# Altium PCB PCB.PcbDoc (part 1 of 3)
Units mm, origin at the board's own origin, x right, y up, seen from the top; angles counter-clockwise.
Board outline 58.5 x 91.95 mm, 2 copper layers (Top Layer, Bottom Layer), stack 1.571 mm thick; 57 components, 46 nets, 183 pads, 18 vias.
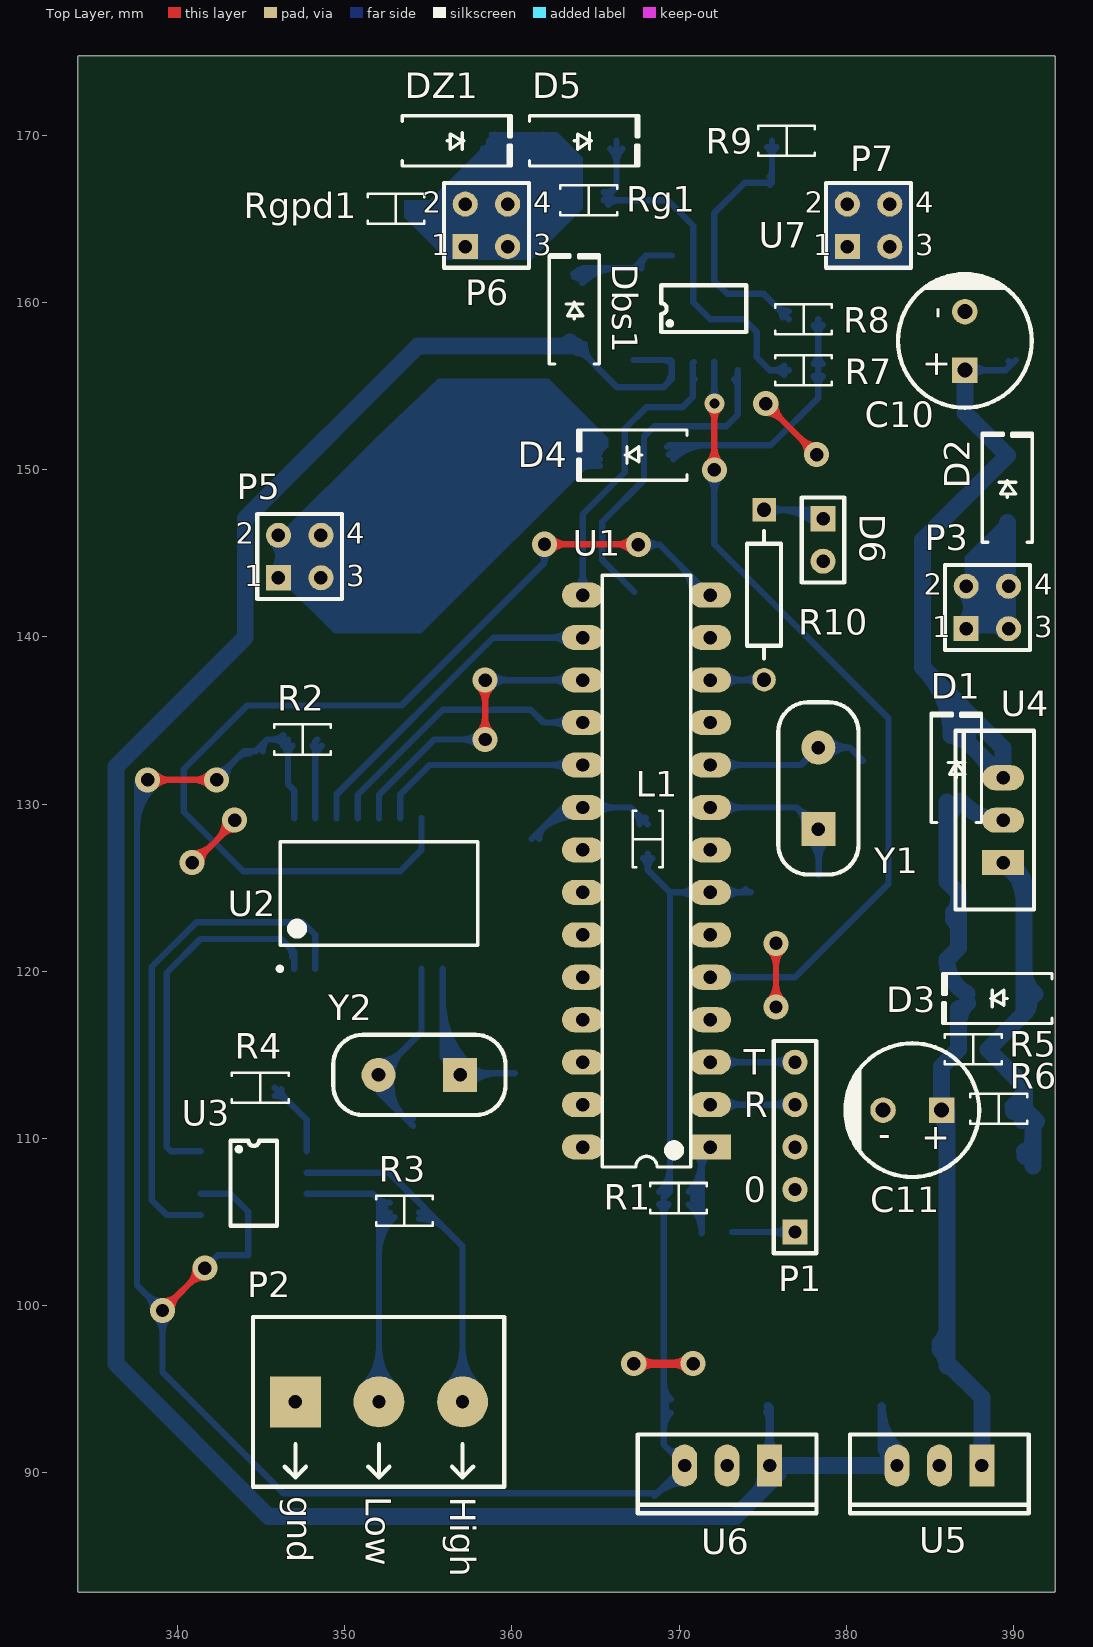
[diagram p0: Top Layer view]
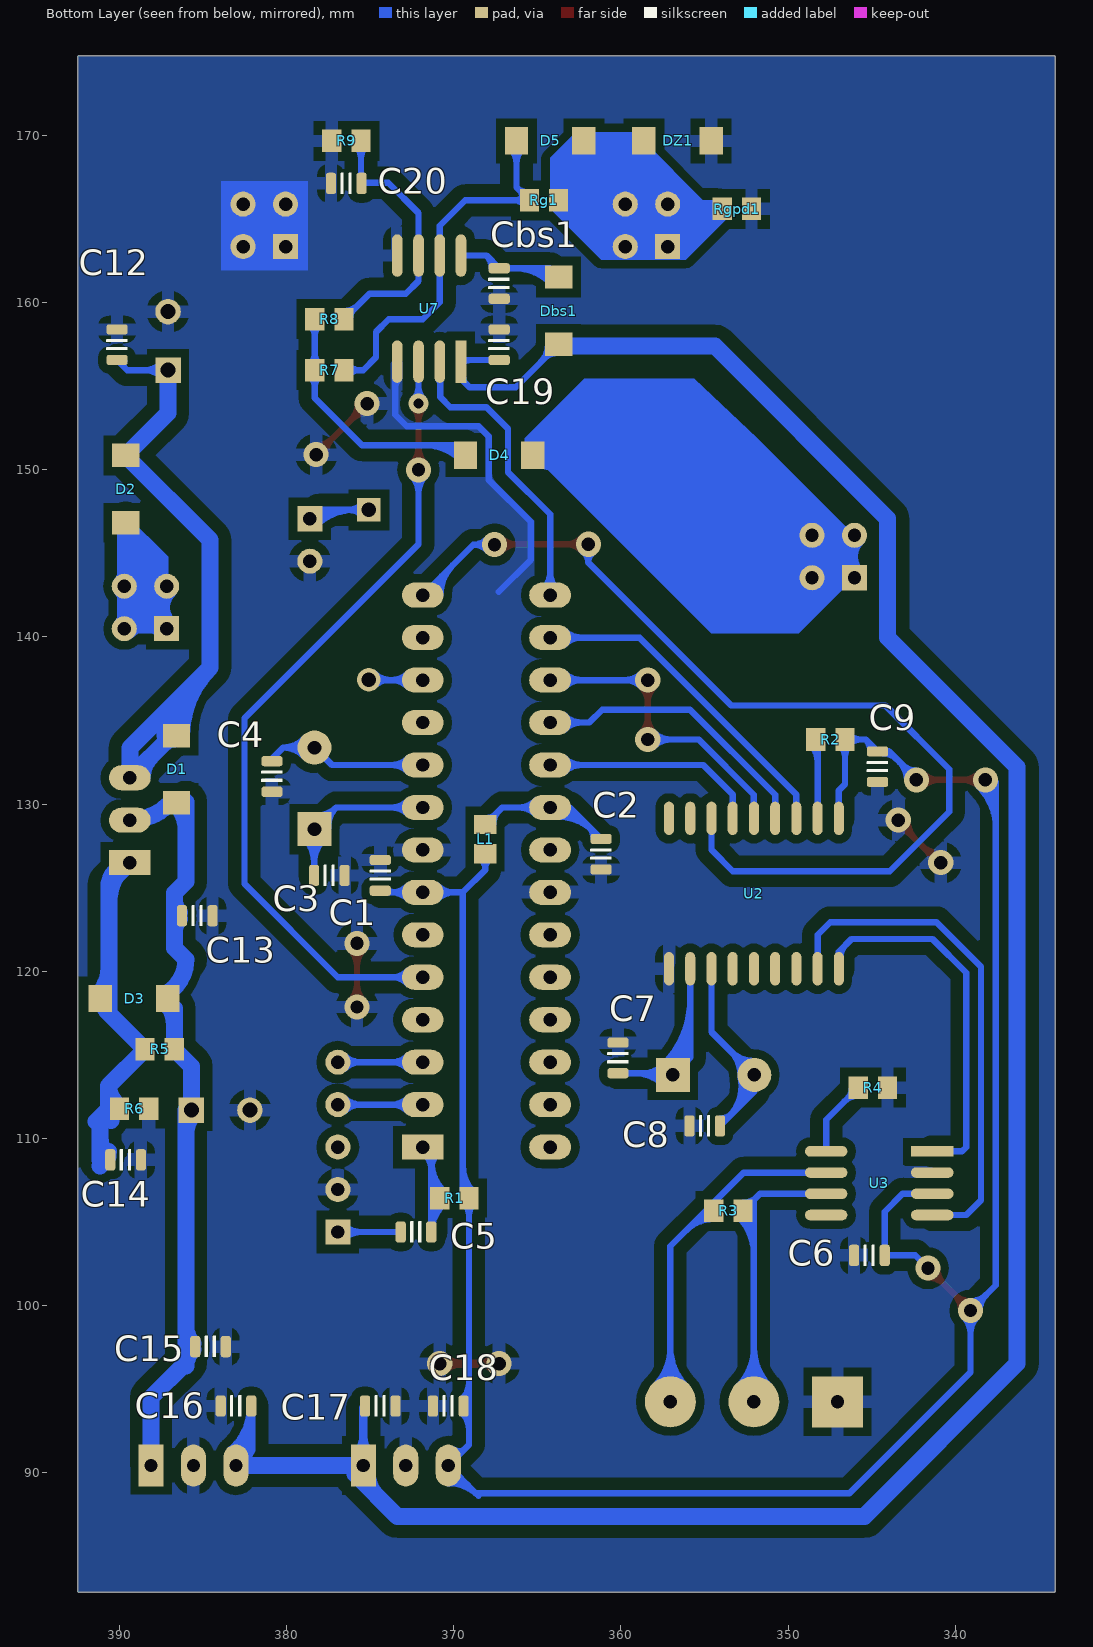
[diagram p1: Bottom Layer view, seen from below]
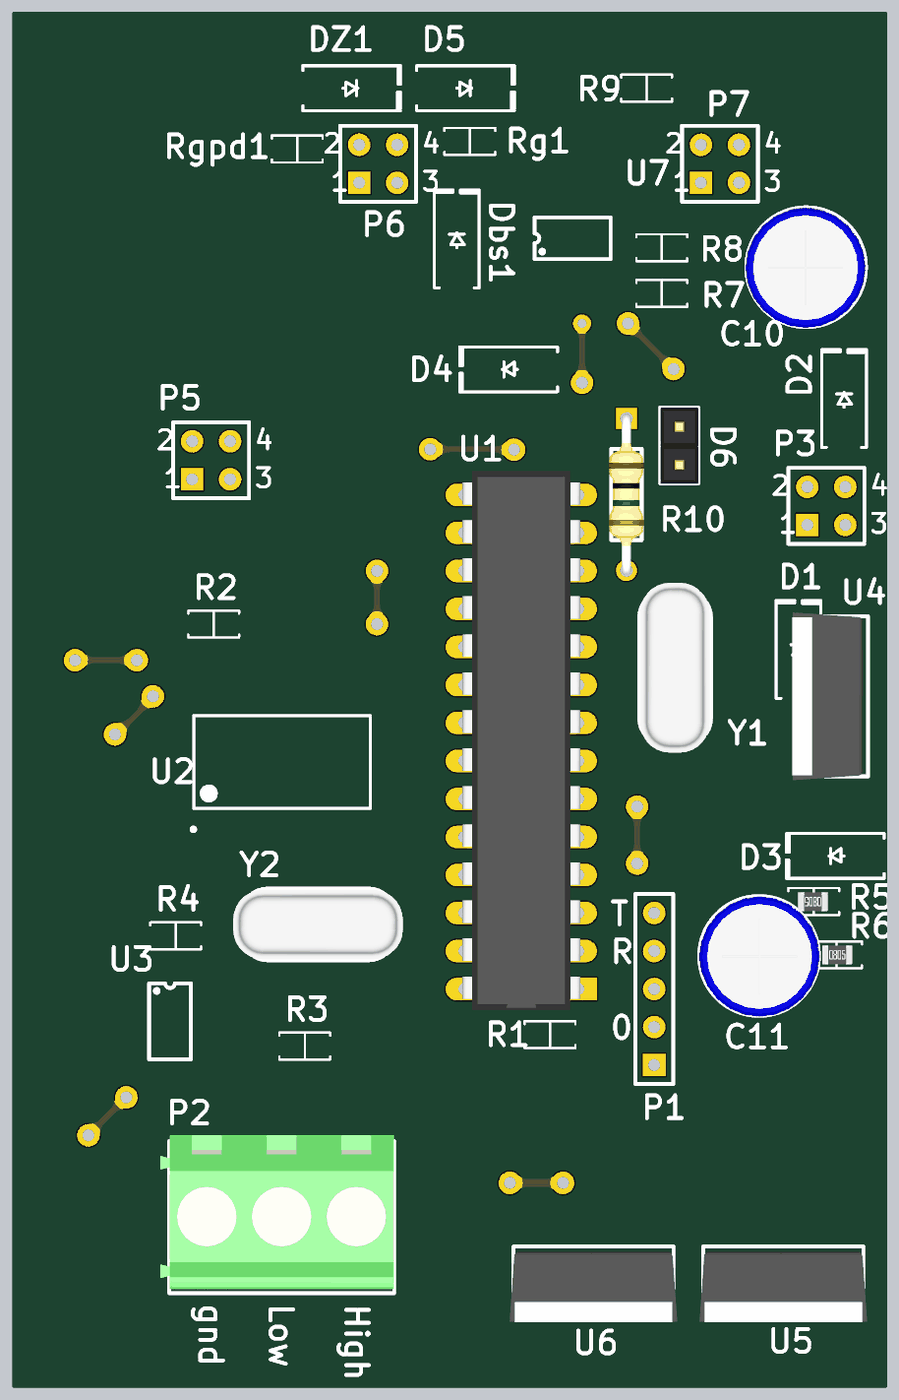
[diagram p4: 3D render of the assembled board from above, using the file's embedded part models]
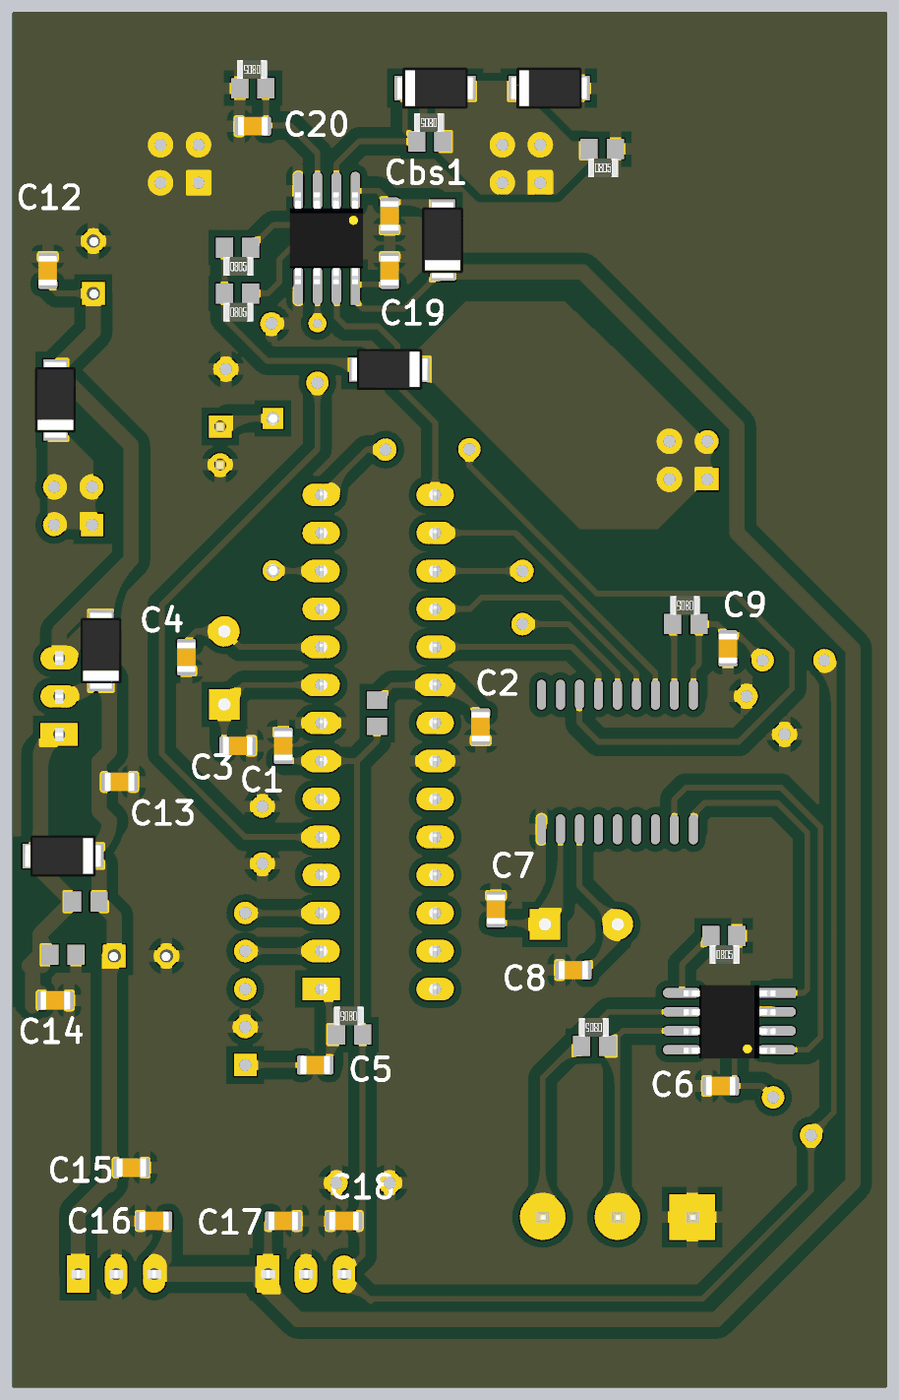
[diagram p5: 3D render of the assembled board from below, using the file's embedded part models]

## Layer stack, top to bottom
Top Layer: signal copper 0.0356
Dielectric: core 1.5, FR-4, Dk 4.8
Bottom Layer: signal copper 0.0356

## Board outline
334.01,82.957 ccw(c334.137,82.957) 334.137,82.83 392.382,82.83 ccw(c392.382,82.957) 392.51,82.957 ccw(c392.382,82.957) 392.499,83.007 ccw(c392.382,83.058) 392.51,83.058 392.51,174.651 ccw(c392.382,174.651) 392.382,174.778 334.137,174.778 ccw(c334.137,174.651) 334.01,174.651

## Design rules (kind name [scope] priority, off if disabled: settings)
Clearance Clearance_plane [(OnLayer('Bottom Layer') AND IsTrack) vs InNet('SOURCE')] p1: gap=0.762
Clearance [All] p2: gap=0.508
ComponentClearance [All] p1 off: gap=0.254 collisioncheckmode=3 verticalgap=0.254 showdistances=FALSE
HoleSize [All] p1: absolutevalues=TRUE maxlimit=4 minlimit=0.8 maxpercent=80.000 minpercent=20.000
PolygonConnect [All] p1: connectstyle=Relief reliefconductorwidth=0.762 reliefentries=4 polygonreliefangle="90 Angle"
RoutingVias [All] p1: holewidth=0.8 width=1.5 viastyle="Through Hole" minholewidth=0.8 minwidth=1.5 maxholewidth=1 maxwidth=2
SilkToSilkClearance [All] p1: silktosilkclearance=0.508
SilkscreenOverComponentPads [All] p1: minsilkscreentomaskgap=0.508
SolderMaskExpansion [All] p1: expansion=0.102
Width [All] p1: maxlimit=1.016 minlimit=0.381 preferedwidth=0.508
24 further rules are at their usual default settings.

## Classes and differential pairs
component class atmega: C1 C2 C3 C4 C5 C6 C7 C8 C9 D6 D? L1 P1 P2 R1 R2 R3 R4 R10 U1 U2 U3 Y1 Y2
component class driver: C19 C20 Cbs1 D4 D5 Dbs1 DZ1 P5 P6 P7 R7 R8 R9 Rg1 Rgpd1 U7
component class supplies: C10 C11 C12 C13 C14 C15 C16 C17 C18 D1 D2 D3 P3 R5 R6 U4 U5 U6

## Components (designator, comment, footprint, x,y, rotation, side; value= is the part's Value field where it differs from the comment)
C1 "100nF" CAP_0805 374.396,125.73 r90 bottom
C2 "100nF" CAP_0805 361.188,127 r90 bottom
C3 "22pF" CAP_0805 377.444,125.73 r0 bottom
C4 "22pF" CAP_0805 380.873,131.648 r90 bottom
C5 "100nF" CAP_0805 372.262,104.394 r0 bottom
C6 "100nF" CAP_0805 345.135,102.997 r0 bottom
C7 "22pF" CAP_0805 360.172,114.808 r270 bottom
C8 "22pF" CAP_0805 354.99,110.744 r180 bottom
C9 "100nF" CAP_0805 344.653,132.232 r270 bottom
C10 "CapacitorPol" CP3.5mm-8.0mm 387.096,155.956 r270 top
C11 "CapacitorPol" CP3.5mm-8.0mm 385.699,111.684 r0 top
C12 "100nF" CAP_0805 390.144,157.48 r270 bottom
C13 "100nF" CAP_0805 385.343,123.317 r0 bottom
C14 "100nF" CAP_0805 389.636,108.712 r0 bottom
C15 "100nF" CAP_0805 384.556,97.536 r0 bottom
C16 "100nF" CAP_0805 383.032,93.98 r180 bottom
C17 "100nF" CAP_0805 374.396,93.98 r0 bottom
C18 "100nF" CAP_0805 370.332,93.98 r180 bottom
C19 "100nF" CAP_0805 367.284,157.48 r90 bottom
C20 "100nF" CAP_0805 376.428,167.132 r0 bottom
Cbs1 "100nF" CAP_0805 367.284,161.138 r270 bottom
D1 "BYD77" "ST DO214AC SMA" 386.588,132.08 r90 top
D2 "BYD77" "ST DO214AC SMA" 389.636,148.844 r90 top
D3 "BYD77" "ST DO214AC SMA" 389.128,118.364 r180 top
D4 "BYD77" "ST DO214AC SMA" 367.284,150.876 r180 top
D5 "BYD77" "ST DO214AC SMA" 364.236,169.672 r0 top
D6 "color?" HDR1X2 378.612,147.066 r270 top
Dbs1 "BYD77" "ST DO214AC SMA" 363.728,159.512 r90 top
DZ1 "Z15V" "ST DO214AC SMA" 356.616,169.672 r0 top
L1 "?H" "RES 0805/2012" 368.122,127.903 r270 top
P1 "USART" HDR1X5 376.936,104.394 r90 top
P2 "CAN" KRE_3 347.044,94.234 r0 top
P3 "Header 2X2" HDR2X2 387.175,140.488 r0 top locked
P5 "Header 2X2" HDR2X2 346.027,143.536 r0 top locked
P6 "Header 2X2" HDR2X2 357.203,163.348 r0 top locked
P7 "Header 2X2" HDR2X2 380.063,163.348 r0 top locked
R1 "10k" "RES 0805/2012" 369.965,106.426 r0 top
R2 "10k" "RES 0805/2012" 347.472,133.858 r0 top
R3 "120" "RES 0805/2012" 353.568,105.664 r0 top
R4 "10k" "RES 0805/2012" 344.932,113.03 r180 top
R5 "?K" "RES 0805/2012" 387.604,115.316 r180 top
R6 "?K" "RES 0805/2012" 389.128,111.76 r0 top
R7 "?K" "RES 0805/2012" 377.444,155.956 r180 top
R8 "?K" "RES 0805/2012" 377.444,159.004 r180 top
R9 "?K" "RES 0805/2012" 376.428,169.672 r0 top
R10 "470" R400-2.0mm 375.082,147.599 r270 top
Rg1 "1R" "RES 0805/2012" 364.603,166.116 r0 top
Rgpd1 "10k" "RES 0805/2012" 353.06,165.608 r180 top
U1 "ATmega328P" DIP28-300(100) 371.856,109.474 r90 top
U2 "MCP2515-E/SO" WSO18_L 352.044,124.642 r90 top
U3 "MCP2551-I/SN" SOIC08-150(50) 341.376,109.22 r270 top
U4 "LM317" TO-220/123 389.382,126.492 r90 top
U5 "LM7815" TO-220/123 388.112,90.424 r180 top
U6 "LM7805" TO-220/123 375.412,90.424 r180 top
U7 "IR2127S" SOIC08-150(50) 369.57,156.464 r0 top
Y1 "16MHz" HC49-US-THT 378.333,130.937 r90 top
Y2 "16MHz" HC49-US-THT 354.457,113.792 r180 top

## Footprints (in the part's own frame and the unit in brackets; to place one, negate y for a bottom-side part, rotate by r counter-clockwise, add the part's x,y. Pads: shape width x height; smd on the part's side, far side on the other; paste and mask are expansions set on the pad)
CAP_0805 [mil]
  rrect50% 24x50 smd: 1(-36,0) 2(36,0)
  silkscreen extent -12,-24 12,24, body extent -39,-25 39,25, height 39
CP3.5mm-8.0mm [mil] "Capacitor, Electrolytic, Radial; Body 8 x 10.5 mm (Dia.xH typ); Pin Spacing 3.5 mm (typ)"
  rect 60x60 hole 35: 1(0,0)
  round 60 hole 35: 2(-137.8,0)
  silkscreen extent -226,-157 89,157, body extent -226,-160 91,157, height 468
DIP28-300(100) [mm] "DIP, 28-Leads, Row Spacing 7.62mm, Pitch 2.54mm, Body 34.67x7.3mm"
  rect 1.5x2.5 hole 0.8: 1(0,0)
  oval 1.5x2.5 hole 0.8: 2(2.54,0) 3(5.08,0) 4(7.62,0) 5(10.16,0) 6(12.7,0) 7(15.24,0) 8(17.78,0) 9(20.32,0) 10(22.86,0) 11(25.4,0) 12(27.94,0) 13(30.48,0) 14(33.02,0) 15(33.02,7.62) 16(30.48,7.62) 17(27.94,7.62) 18(25.4,7.62) 19(22.86,7.62) 20(20.32,7.62) 21(17.78,7.62) 22(15.24,7.62) 23(12.7,7.62) 24(10.16,7.62) 25(7.62,7.62) 26(5.08,7.62) 27(2.54,7.62) 28(0,7.62)
  silkscreen extent -1.19,1.16 34.21,6.46, body extent -1.4,-0.13 34.6,7.74, height 5.08
HC49-US-THT [mil] "THT Quartz Crystal"
  rect 80x80 hole 32: 1(-96.06,0)
  round 80 hole 32: 2(96.06,0)
  silkscreen extent -203,-94 203,94, body extent -223,-91 224,92, height 138
HDR1X2 [mm] "Connector; Header; 2 Position"
  rect 1.5x1.5 hole 0.8: 1(0,0)
  round 1.5 hole 0.8: 2(2.54,0)
  silkscreen extent -1.27,-1.27 3.81,1.27, body extent -1.24,-1.27 3.84,1.27, height 8.68
HDR1X5 [mm] "Connector; Header; 5 Position"
  rect 1.5x1.5 hole 0.8: 1(0,0)
  round 1.5 hole 0.8: 2(2.54,0) 3(5.08,0) 4(7.62,0) 5(10.16,0)
  silkscreen extent -1.27,-1.27 11.43,1.27
HDR2X2 [mm] "Connector; Header; 2x2 Position"
  rect 1.5x1.5 hole 0.8: 1(0,0)
  round 1.5 hole 0.8: 2(0,2.54) 3(2.54,0) 4(2.54,2.54)
  silkscreen extent -1.27,-1.27 3.81,3.81
KRE_3 [mil] "Terminal Block 3 pins"
  rect 120x120 hole 31.5: 1(0,0)
  round 120 hole 31.5: 2(196.85,0) 3(393.7,0)
  silkscreen extent -100,-200 492,200, body extent -123,-190 491,216, height 559
R400-2.0mm [mm] "Axial Device, Thru-Hole; 2 Leads; 0.4 in Pin Spacing"
  rect 1.4x1.4 hole 0.85: 1(0,0)
  round 1.4 hole 0.85: 2(10.16,0)
  silkscreen extent 1.27,-1.02 8.89,1.02, body extent -0.3,-1.17 10.46,1.14, height 2.93
"RES 0805/2012" [mm] "Chip Resistor, 2-Leads, Body 2.00x1.25mm, IPC Medium Density"
  rect 1.15x1.35 smd far side: 1(-0.875,0) 2(0.875,0)
  silkscreen extent -1.7,-0.9 1.7,0.9, body extent -0.95,-0.62 1.05,0.63, height 0.6
SOIC08-150(50) [mm] "SOIC; 8 Leads; Row Spacing 3.81 mm; Pitch 1.27 mm; 3D Antonio Fagaldo"
  rect 0.635x2.54 smd far side: 1(0,0)
  oval 0.635x2.54 smd far side: 2(1.27,0) 3(2.54,0) 4(3.81,0) 5(3.81,6.35) 6(2.54,6.35) 7(1.27,6.35) 8(0,6.35)
  silkscreen extent -0.64,1.78 4.44,4.57, body extent -0.51,0.11 4.38,6.24, height 1.76
"ST DO214AC SMA" [mm] "Molded Diode, 2-Leads, Body 4.30x2.60mm, IPC Medium Density"
  rect 1.4x1.64 smd far side: 1(-2.015,0) 2(2.015,0)
  silkscreen extent -3.18,-1.5 3.35,1.5, body extent -2.6,-1.37 2.6,1.37, height 2.4
TO-220/123 [mm] "TO, Thru-Hole, Vertical, Heatsink Mounted; 3 In-Line Leads; Pitch 2.54 mm"
  rect 1.5x2.5 hole 0.8: 1(0,0)
  oval 1.5x2.5 hole 0.8: 2(2.54,0) 3(5.08,0)
  silkscreen extent -2.81,-1.85 7.89,2.85, body extent -3.07,-1.49 8.15,3.2, height 19.68
WSO18_L [mm] "18-Pin Small Outline Integrated Circuit 1.27 mm Pitch, IPC High Density"
  oval 2x0.6 smd far side: 1(-4.5,5.08) 2(-4.5,3.81) 3(-4.5,2.54) 4(-4.5,1.27) 5(-4.5,0) 6(-4.5,-1.27) 7(-4.5,-2.54) 8(-4.5,-3.81) 9(-4.5,-5.08) 10(4.5,-5.08) 11(4.5,-3.81) 12(4.5,-2.54) 13(4.5,-1.27) 14(4.5,0) 15(4.5,1.27) 16(4.5,2.54) 17(4.5,3.81) 18(4.5,5.08)
  silkscreen extent -4.62,-5.9 3.1,6.05, body extent -3.8,-5.95 3.8,5.95, height 2.65

## Part data
C1 C2 C3 C4 C5 C6 C7 C8 C9 C12 C13 C14 C15 C16 C17 C18 C19 C20 Cbs1: library part Cap_0805, "Capacitor"
C10 C11: "Solid Aluminum Capacitor with Organic Semiconductor Electrolyte: 100uF, 10V, Bulk Pack"
D1 D2 D3 D4 D5 Dbs1 DZ1: library part Diode_SMA, "Diode"
D6: library part LED_0805, "LED"
L1: library part Ind_0805, "Inductor"
P1: library part "Header 5", "Header, 5-Pin"
P2: library part KRE_3, "Terminal Block 1x3"
P3 P5 P6 P7: "Header, 2-Pin, Dual row"
R1 R2 R3 R4 R5 R6 R7 R8 R9 R10 Rg1 Rgpd1: library part Res_0805, "Resistor"
U1: "8-bit AVR Microcontroller, 32KB Flash, 1KB EEPROM, 2KB SRAM, 28-pin PDIP, Industrial Grade (-40°C to 85°C)"
U2: library part CMP-0186-00035-2, "Stand-Alone CAN Controller With SPI Interface, 18-Pin SOIC, Extended Temperature"
U3: library part CMP-1721-00003-1, "High-Speed CAN Transceiver, / 1 Mb/s, 4.5 to 5.5 V, 8-Pin SOIC (SN), Industrial Temperature, RoHS, Tube"
U4: library part L7805ACV, "Precision 1A Regulator"
U5 U6: library part µA7805CKC, "Positive-Voltage Regulator"
U7: "Current Sensing Single Channel Driver"
Y1 Y2: library part Crystal, "Crystal"

## Via types
v1: diameter 1.5, hole 0.8, Top Layer to Bottom Layer, 17 vias
v2: diameter 1.2, hole 0.6, Top Layer to Bottom Layer, 1 vias

## Nets (pads, with @x,y where several pads share a name; then routed paths per layer and width w, separated by ;. In a path a pad name is that pad's centre, name@x,y a point inside that pad or via, vN(x,y) a via of type N, cw(c..) or ccw(c..) an arc to the next point about the centre after c; other vN are vias at no path point)
+5V: C1.1 C6.1 C9.1 C18.2 L1.2 R1.1 R2.1 U1.7 U2.18 U3.3 U6.3 | length 312
  Top Layer w0.381: v1(338.201,131.445) v1(342.328,131.445) ; v1(339.09,99.695) v1(341.63,102.235) ; v1@338.597,131.049 cw(c339.552,130.094) 339.552,131.445 ; v1@338.597,131.049 cw(c339.552,130.094) 339.552,131.445 ; v1@338.597,131.049 cw(c339.552,130.094) 339.552,131.445 ; v1@338.597,131.049 cw(c339.552,130.094) 339.552,131.445 ; v1@338.597,131.841 ccw(c339.552,132.796) 339.552,131.445 ; v1@338.597,131.841 ccw(c339.552,132.796) 339.552,131.445 ; v1@338.597,131.841 ccw(c339.552,132.796) 339.552,131.445 ; v1@338.597,131.841 ccw(c339.552,132.796) 339.552,131.445 ; v1@339.09,100.254 ccw(c339.09,101.605) 340.045,100.65 ; v1@339.09,100.254 ccw(c339.09,101.605) 340.045,100.65 ; v1@339.09,100.254 ccw(c339.09,101.605) 340.045,100.65 ; v1@339.09,100.254 ccw(c339.09,101.605) 340.045,100.65 ; v1@339.649,99.695 cw(c341,99.695) 340.045,100.65 ; v1@339.649,99.695 cw(c341,99.695) 340.045,100.65 ; v1@339.649,99.695 cw(c341,99.695) 340.045,100.65 ; v1@339.649,99.695 cw(c341,99.695) 340.045,100.65 ; 340.675,101.28 cw(c341.63,100.325) v1@341.63,101.676 ; 340.675,101.28 ccw(c339.72,102.235) v1@341.071,102.235 ; 340.675,101.28 cw(c341.63,100.325) v1@341.63,101.676 ; 340.675,101.28 ccw(c339.72,102.235) v1@341.071,102.235 ; 340.675,101.28 cw(c341.63,100.325) v1@341.63,101.676 ; 340.675,101.28 ccw(c339.72,102.235) v1@341.071,102.235 ; 340.675,101.28 cw(c341.63,100.325) v1@341.63,101.676 ; 340.675,101.28 ccw(c339.72,102.235) v1@341.071,102.235 ; 340.978,131.445 cw(c340.978,130.094) v1@341.933,131.049 ; 340.978,131.445 ccw(c340.978,132.796) v1@341.933,131.841 ; 340.978,131.445 cw(c340.978,130.094) v1@341.933,131.049 ; 340.978,131.445 ccw(c340.978,132.796) v1@341.933,131.841 ; 340.978,131.445 cw(c340.978,130.094) v1@341.933,131.049 ; 340.978,131.445 ccw(c340.978,132.796) v1@341.933,131.841 ; 340.978,131.445 cw(c340.978,130.094) v1@341.933,131.049 ; 340.978,131.445 ccw(c340.978,132.796) v1@341.933,131.841
  Bottom Layer w0.381: v1@337.82,131.572 337.566,131.318 337.566,101.219 v1(339.09,99.695) 339.09,96.012 346.329,88.773 368.681,88.773 U6.3@370.332,90.424 369.09,91.666 R1.1@369.09,106.426 369.457,106.793 369.457,124.714 ; U3.3@341.376,106.68 343.154,106.68 344.221,105.613 C6.1@344.221,102.997 342.392,102.997 v1(341.63,102.235) ; v1@342.297,131.477 343.967,133.147 C9.1@344.653,133.147 345.364,133.858 ; U2.18@346.964,129.142 346.964,130.81 346.597,131.177 R2.1@346.597,133.858 345.364,133.858 ; L1.2@368.122,127.028 368.122,126.049 369.457,124.714 ; C1.1@374.294,124.714 U1.7@371.856,124.714 369.457,124.714 ; 337.566,128.561 cw(c341.085,128.561) v1@338.597,131.049 ; 337.566,128.561 cw(c341.085,128.561) v1@338.597,131.049 ; 337.566,128.561 cw(c341.085,128.561) v1@338.597,131.049 ; 337.566,128.561 cw(c341.085,128.561) v1@338.597,131.049 ; 337.566,129.481 cw(c340.165,129.481) v1@338.327,131.319 ; 337.566,129.481 cw(c340.165,129.481) v1@338.327,131.319 ; 337.566,129.481 cw(c340.165,129.481) v1@338.327,131.319 ; 337.566,129.481 cw(c340.165,129.481) v1@338.327,131.319 ; 337.566,130.401 cw(c339.245,130.401) v1@338.058,131.588 ; 337.566,130.401 cw(c339.245,130.401) v1@338.058,131.588 ; 337.566,130.401 cw(c339.245,130.401) v1@338.058,131.588 ; 337.566,130.401 cw(c339.245,130.401) v1@338.058,131.588 ; 338.135,100.65 cw(c337.18,99.695) v1@338.531,99.695 ; 338.135,100.65 ccw(c339.09,101.605) v1@339.09,100.254 ; 338.135,100.65 cw(c337.18,99.695) v1@338.531,99.695 ; 338.135,100.65 ccw(c339.09,101.605) v1@339.09,100.254 ; 338.135,100.65 cw(c337.18,99.695) v1@338.531,99.695 ; 338.135,100.65 ccw(c339.09,101.605) v1@339.09,100.254 ; 338.135,100.65 cw(c337.18,99.695) v1@338.531,99.695 ; 338.135,100.65 ccw(c339.09,101.605) v1@339.09,100.254 ; v1@338.694,99.299 cw(c337.739,98.344) 339.09,98.344 ; v1@338.694,99.299 cw(c337.739,98.344) 339.09,98.344 ; v1@338.694,99.299 cw(c337.739,98.344) 339.09,98.344 ; v1@338.694,99.299 cw(c337.739,98.344) 339.09,98.344 ; 339.09,98.344 cw(c340.441,98.344) v1@339.486,99.299 ; 339.09,98.344 cw(c340.441,98.344) v1@339.486,99.299 ; 339.09,98.344 cw(c340.441,98.344) v1@339.486,99.299 ; 339.09,98.344 cw(c340.441,98.344) v1@339.486,99.299 ; v1@342.328,132.004 ccw(c342.328,133.202) 343.175,132.355 ; v1@342.328,132.004 ccw(c342.328,133.202) 343.175,132.355 ; v1@342.328,132.004 ccw(c342.328,133.202) 343.175,132.355 ; v1@342.328,132.004 ccw(c342.328,133.202) 343.175,132.355 ; v1@342.888,131.445 cw(c344.392,131.445) 343.329,132.509 ; v1@342.888,131.445 cw(c344.392,131.445) 343.329,132.509 ; v1@342.888,131.445 cw(c344.392,131.445) 343.329,132.509 ; v1@342.888,131.445 cw(c344.392,131.445) 343.329,132.509 ; 343.52,132.7 cw(c344.322,131.898) C9.1@344.322,133.032 ; 343.52,132.7 cw(c344.322,131.898) C9.1@344.322,133.032 ; 343.52,132.7 cw(c344.322,131.898) C9.1@344.322,133.032 ; 343.52,132.7 cw(c344.322,131.898) C9.1@344.322,133.032 ; C9.1@345.097,133.154 cw(c346.012,133.21) 345.364,133.858 ; C9.1@345.097,133.154 cw(c346.012,133.21) 345.364,133.858 ; C9.1@345.097,133.154 cw(c346.012,133.21) 345.364,133.858 ; C9.1@345.097,133.154 cw(c346.012,133.21) 345.364,133.858 ; 345.669,133.858 cw(c345.669,132.93) R2.1@346.325,133.586 ; 345.669,133.858 ccw(c345.669,134.786) R2.1@346.325,134.13 ; 345.669,133.858 cw(c345.669,132.93) R2.1@346.325,133.586 ; 345.669,133.858 ccw(c345.669,134.786) R2.1@346.325,134.13 ; 345.669,133.858 cw(c345.669,132.93) R2.1@346.325,133.586 ; 345.669,133.858 ccw(c345.669,134.786) R2.1@346.325,134.13 ; 345.669,133.858 cw(c345.669,132.93) R2.1@346.325,133.586 ; 345.669,133.858 ccw(c345.669,134.786) R2.1@346.325,134.13 ; R2.1@346.325,133.486 cw(c345.669,132.83) 346.597,132.83 ; R2.1@346.325,133.486 cw(c345.669,132.83) 346.597,132.83 ; R2.1@346.325,133.486 cw(c345.669,132.83) 346.597,132.83 ; R2.1@346.325,133.486 cw(c345.669,132.83) 346.597,132.83 ; 346.597,132.83 cw(c347.525,132.83) R2.1@346.869,133.486 ; 346.597,132.83 cw(c347.525,132.83) R2.1@346.869,133.486 ; 346.597,132.83 cw(c347.525,132.83) R2.1@346.869,133.486 ; 346.597,132.83 cw(c347.525,132.83) R2.1@346.869,133.486 ; L1.2@367.85,126.756 cw(c367.194,126.1) 368.122,126.1 ; L1.2@367.85,126.756 cw(c367.194,126.1) 368.122,126.1 ; L1.2@367.85,126.756 cw(c367.194,126.1) 368.122,126.1 ; L1.2@367.85,126.756 cw(c367.194,126.1) 368.122,126.1 ; 368.122,126.1 cw(c369.05,126.1) L1.2@368.394,126.756 ; 368.122,126.1 cw(c369.05,126.1) L1.2@368.394,126.756 ; 368.122,126.1 cw(c369.05,126.1) L1.2@368.394,126.756 ; 368.122,126.1 cw(c369.05,126.1) L1.2@368.394,126.756 ; 368.523,88.615 cw(c370.332,86.807) U6.3@370.332,89.364 ; 368.523,88.615 cw(c370.332,86.807) U6.3@370.332,89.364 ; 368.523,88.615 cw(c370.332,86.807) U6.3@370.332,89.364 ; 368.523,88.615 cw(c370.332,86.807) U6.3@370.332,89.364 ; R1.1@368.818,106.054 cw(c368.162,105.398) 369.09,105.398 ; R1.1@368.818,106.054 cw(c368.162,105.398) 369.09,105.398 ; R1.1@368.818,106.054 cw(c368.162,105.398) 369.09,105.398 ; R1.1@368.818,106.054 cw(c368.162,105.398) 369.09,105.398 ; R1.1@368.818,106.798 ccw(c367.276,108.34) 369.457,108.34 ; R1.1@368.818,106.798 ccw(c367.276,108.34) 369.457,108.34 ; R1.1@368.818,106.798 ccw(c367.276,108.34) 369.457,108.34 ; R1.1@368.818,106.798 ccw(c367.276,108.34) 369.457,108.34 ; R1.1@369.088,106.528 ccw(c368.196,107.42) 369.457,107.42 ; R1.1@369.088,106.528 ccw(c368.196,107.42) 369.457,107.42 ; R1.1@369.088,106.528 ccw(c368.196,107.42) 369.457,107.42 ; R1.1@369.088,106.528 ccw(c368.196,107.42) 369.457,107.42 ; 369.09,92.583 cw(c370.484,92.583) C18.2@369.498,93.569 ; 369.09,92.583 cw(c370.484,92.583) C18.2@369.498,93.569 ; 369.09,92.583 cw(c370.484,92.583) C18.2@369.498,93.569 ; 369.09,92.583 cw(c370.484,92.583) C18.2@369.498,93.569 ; 369.09,93.503 cw(c369.565,93.503) C18.2@369.229,93.838 ; 369.09,93.503 cw(c369.565,93.503) C18.2@369.229,93.838 ; 369.09,93.503 cw(c369.565,93.503) C18.2@369.229,93.838 ; 369.09,93.503 cw(c369.565,93.503) C18.2@369.229,93.838 ; 369.09,94.457 ccw(c369.565,94.457) C18.2@369.229,94.122 ; 369.09,94.457 ccw(c369.565,94.457) C18.2@369.229,94.122 ; 369.09,94.457 ccw(c369.565,94.457) C18.2@369.229,94.122 ; 369.09,94.457 ccw(c369.565,94.457) C18.2@369.229,94.122 ; 369.09,95.377 ccw(c370.484,95.377) C18.2@369.498,94.391 ; 369.09,95.377 ccw(c370.484,95.377) C18.2@369.498,94.391 ; 369.09,95.377 ccw(c370.484,95.377) C18.2@369.498,94.391 ; 369.09,95.377 ccw(c370.484,95.377) C18.2@369.498,94.391 ; 369.09,105.398 cw(c370.018,105.398) R1.1@369.362,106.054 ; 369.09,105.398 cw(c370.018,105.398) R1.1@369.362,106.054 ; 369.09,105.398 cw(c370.018,105.398) R1.1@369.362,106.054 ; 369.09,105.398 cw(c370.018,105.398) R1.1@369.362,106.054 ; 369.174,89.266 cw(c370.332,88.107) U6.3@370.332,89.745 ; 369.174,89.266 cw(c370.332,88.107) U6.3@370.332,89.745 ; 369.174,89.266 cw(c370.332,88.107) U6.3@370.332,89.745 ; 369.174,89.266 cw(c370.332,88.107) U6.3@370.332,89.745 ; 369.34,91.416 ccw(c369.694,91.77) U6.3@369.995,91.371 ; 369.34,91.416 ccw(c369.694,91.77) U6.3@369.995,91.371 ; 369.34,91.416 ccw(c369.694,91.77) U6.3@369.995,91.371 ; 369.34,91.416 ccw(c369.694,91.77) U6.3@369.995,91.371 ; 370.005,124.714 cw(c370.005,123.363) U1.7@370.96,124.318 ; 370.005,124.714 ccw(c370.005,126.065) U1.7@370.96,125.11 ; 370.005,124.714 cw(c370.005,123.363) U1.7@370.96,124.318 ; 370.005,124.714 ccw(c370.005,126.065) U1.7@370.96,125.11 ; 370.005,124.714 cw(c370.005,123.363) U1.7@370.96,124.318 ; 370.005,124.714 ccw(c370.005,126.065) U1.7@370.96,125.11 ; 370.005,124.714 cw(c370.005,123.363) U1.7@370.96,124.318 ; 370.005,124.714 ccw(c370.005,126.065) U1.7@370.96,125.11 ; U1.7@372.752,124.318 cw(c373.707,123.363) 373.707,124.714 ; U1.7@372.752,124.318 cw(c373.707,123.363) 373.707,124.714 ; U1.7@372.752,124.318 cw(c373.707,123.363) 373.707,124.714 ; U1.7@372.752,124.318 cw(c373.707,123.363) 373.707,124.714 ; U1.7@372.752,125.11 ccw(c373.707,126.065) 373.707,124.714 ; U1.7@372.752,125.11 ccw(c373.707,126.065) 373.707,124.714 ; U1.7@372.752,125.11 ccw(c373.707,126.065) 373.707,124.714 ; U1.7@372.752,125.11 ccw(c373.707,126.065) 373.707,124.714 ; 373.545,124.714 ccw(c373.545,125.337) C1.1@373.985,124.896 ; 373.545,124.714 ccw(c373.545,125.337) C1.1@373.985,124.896 ; 373.545,124.714 ccw(c373.545,125.337) C1.1@373.985,124.896 ; 373.545,124.714 ccw(c373.545,125.337) C1.1@373.985,124.896
+5V_ADC: C2.2 L1.1 U1.20 | length 45.1
  Bottom Layer w0.381: C2.2@361.188,127.914 363.068,129.794 U1.20@364.236,129.794 367.106,129.794 L1.1@368.122,128.778 ; C2.2@361.632,127.914 cw(c362.706,127.914) 361.947,128.673 ; C2.2@361.632,127.914 cw(c362.706,127.914) 361.947,128.673 ; C2.2@361.632,127.914 cw(c362.706,127.914) 361.947,128.673 ; C2.2@361.632,127.914 cw(c362.706,127.914) 361.947,128.673 ; 361.64,128.366 cw(c363.736,126.27) U1.20@363.736,129.235 ; 361.64,128.366 cw(c363.736,126.27) U1.20@363.736,129.235 ; 361.64,128.366 cw(c363.736,126.27) U1.20@363.736,129.235 ; 361.64,128.366 cw(c363.736,126.27) U1.20@363.736,129.235 ; 362.29,129.017 cw(c363.736,127.571) U1.20@363.736,129.616 ; 362.29,129.017 cw(c363.736,127.571) U1.20@363.736,129.616 ; 362.29,129.017 cw(c363.736,127.571) U1.20@363.736,129.616 ; 362.29,129.017 cw(c363.736,127.571) U1.20@363.736,129.616 ; 362.941,129.667 cw(c363.736,128.872) U1.20@363.736,129.997 ; 362.941,129.667 cw(c363.736,128.872) U1.20@363.736,129.997 ; 362.941,129.667 cw(c363.736,128.872) U1.20@363.736,129.997 ; 362.941,129.667 cw(c363.736,128.872) U1.20@363.736,129.997 ; U1.20@365.132,129.398 cw(c366.087,128.443) 366.087,129.794 ; U1.20@365.132,129.398 cw(c366.087,128.443) 366.087,129.794 ; U1.20@365.132,129.398 cw(c366.087,128.443) 366.087,129.794 ; U1.20@365.132,129.398 cw(c366.087,128.443) 366.087,129.794 ; U1.20@365.132,130.19 ccw(c366.087,131.145) 366.087,129.794 ; U1.20@365.132,130.19 ccw(c366.087,131.145) 366.087,129.794 ; U1.20@365.132,130.19 ccw(c366.087,131.145) 366.087,129.794 ; U1.20@365.132,130.19 ccw(c366.087,131.145) 366.087,129.794 ; 367.295,129.605 cw(c366.468,128.778) L1.1@367.638,128.778 ; 367.295,129.605 cw(c366.468,128.778) L1.1@367.638,128.778 ; 367.295,129.605 cw(c366.468,128.778) L1.1@367.638,128.778 ; 367.295,129.605 cw(c366.468,128.778) L1.1@367.638,128.778 ; 367.537,129.364 ccw(c368.022,129.849) L1.1@368.022,129.163 ; 367.537,129.364 ccw(c368.022,129.849) L1.1@368.022,129.163 ; 367.537,129.364 ccw(c368.022,129.849) L1.1@368.022,129.163 ; 367.537,129.364 ccw(c368.022,129.849) L1.1@368.022,129.163
+15V: C16.2 C17.2 C19.1 Dbs1.1 U5.3 U6.1 U7.1 | length 203.2
  Bottom Layer w0.381: Dbs1.1@363.728,157.497 366.285,154.94 369.062,154.94 369.57,155.448 U7.1@369.57,156.464 369.468,156.566 C19.1@367.284,156.566 ; Dbs1.1@363.848,156.988 cw(c363.848,156.047) 364.513,156.712 ; Dbs1.1@363.848,156.988 cw(c363.848,156.047) 364.513,156.712 ; Dbs1.1@363.848,156.988 cw(c363.848,156.047) 364.513,156.712 ; Dbs1.1@363.848,156.988 cw(c363.848,156.047) 364.513,156.712 ; Dbs1.1@364.357,157.497 ccw(c365.877,157.497) 364.803,156.422 ; Dbs1.1@364.357,157.497 ccw(c365.877,157.497) 364.803,156.422 ; Dbs1.1@364.357,157.497 ccw(c365.877,157.497) 364.803,156.422 ; Dbs1.1@364.357,157.497 ccw(c365.877,157.497) 364.803,156.422 ; 369.018,156.566 cw(c369.018,155.912) U7.1@369.48,156.374 ; 369.018,156.566 cw(c369.018,155.912) U7.1@369.48,156.374 ; 369.018,156.566 cw(c369.018,155.912) U7.1@369.48,156.374 ; 369.018,156.566 cw(c369.018,155.912) U7.1@369.48,156.374 ; 369.308,155.186 ccw(c368.983,155.511) U7.1@369.443,155.511 ; 369.308,155.186 ccw(c368.983,155.511) U7.1@369.443,155.511 ; 369.308,155.186 ccw(c368.983,155.511) U7.1@369.443,155.511 ; 369.308,155.186 ccw(c368.983,155.511) U7.1@369.443,155.511
  Bottom Layer w0.508: C17.2@375.31,93.98 375.412,93.878 U6.1@375.412,90.424 ; U5.3@383.032,90.424 382.118,91.338 C16.2@382.118,93.98 ; U6.1@375.061,91.275 ccw(c374.215,92.121) 375.412,92.121 ; U6.1@375.061,91.275 ccw(c374.215,92.121) 375.412,92.121 ; U6.1@375.061,91.275 ccw(c374.215,92.121) 375.412,92.121 ; U6.1@375.061,91.275 ccw(c374.215,92.121) 375.412,92.121 ; C17.2@375.274,93.614 cw(c374.942,93.282) 375.412,93.282 ; C17.2@375.274,93.614 cw(c374.942,93.282) 375.412,93.282 ; C17.2@375.274,93.614 cw(c374.942,93.282) 375.412,93.282 ; C17.2@375.274,93.614 cw(c374.942,93.282) 375.412,93.282 ; 375.412,92.121 ccw(c376.609,92.121) U6.1@375.763,91.275 ; 375.412,92.121 ccw(c376.609,92.121) U6.1@375.763,91.275 ; 375.412,92.121 ccw(c376.609,92.121) U6.1@375.763,91.275 ; 375.412,92.121 ccw(c376.609,92.121) U6.1@375.763,91.275 ; 382.118,91.779 ccw(c383.761,91.779) U5.3@382.695,90.528 ; 382.118,91.779 ccw(c383.761,91.779) U5.3@382.695,90.528 ; 382.118,91.779 ccw(c383.761,91.779) U5.3@382.695,90.528 ; 382.118,91.779 ccw(c383.761,91.779) U5.3@382.695,90.528 ; 382.118,92.879 ccw(c384.699,92.879) U5.3@383.024,90.915 ; 382.118,92.879 ccw(c384.699,92.879) U5.3@383.024,90.915 ; 382.118,92.879 ccw(c384.699,92.879) U5.3@383.024,90.915 ; 382.118,92.879 ccw(c384.699,92.879) U5.3@383.024,90.915 ; C16.2@382.118,93.98 ccw(c385.637,93.98) U5.3@383.354,91.301 ; C16.2@382.118,93.98 ccw(c385.637,93.98) U5.3@383.354,91.301 ; C16.2@382.118,93.98 ccw(c385.637,93.98) U5.3@383.354,91.301 ; C16.2@382.118,93.98 ccw(c385.637,93.98) U5.3@383.354,91.301
  Bottom Layer w1.016: Dbs1.1@363.829,157.396 354.369,157.396 344.043,147.07 344.043,139.954 336.296,132.207 336.296,96.52 345.44,87.376 373.38,87.376 U6.1@375.92,89.916 ; U6.1@375.412,90.424 U5.3@383.032,90.424 ; 362.901,157.396 ccw(c362.901,158.204) Dbs1.1@363.472,157.633 ; 362.901,157.396 ccw(c362.901,158.204) Dbs1.1@363.472,157.633 ; 362.901,157.396 ccw(c362.901,158.204) Dbs1.1@363.472,157.633 ; 362.901,157.396 ccw(c362.901,158.204) Dbs1.1@363.472,157.633 ; 374.634,88.63 ccw(c373.34,89.924) U6.1@375.17,89.924 ; 374.634,88.63 ccw(c373.34,89.924) U6.1@375.17,89.924 ; 374.634,88.63 ccw(c373.34,89.924) U6.1@375.17,89.924 ; 374.634,88.63 ccw(c373.34,89.924) U6.1@375.17,89.924
+18V: C11.1 C13.2 C15.2 D1.1 D3.2 R5.2 U4.2 U5.1 | length 67.4
  Bottom Layer w1.016: C11.1@385.699,111.684 385.699,114.3 386.715,115.316 D3.2@386.715,117.754 ; C11.1@386.024,111.684 386.024,96.576 388.112,94.488 U5.1@388.112,90.424 ; 386.024,128.53 cw(c388.003,128.53) D1.1@386.604,129.929 ; D1.1@386.024,130.119 386.024,125.37 386.715,124.679 386.715,121.391 386.024,120.699 ccw(c388.388,120.699) D3.2@387.209,118.65 ; D1.1@386.853,130.19 ccw(c389.382,132.371) U4.2@389.382,129.032 ; C11.1@385.519,111.504 cw(c384.301,110.286) 386.024,110.286 ; C11.1@385.519,111.504 cw(c384.301,110.286) 386.024,110.286 ; C11.1@385.519,111.504 cw(c384.301,110.286) 386.024,110.286 ; C11.1@385.519,111.504 cw(c384.301,110.286) 386.024,110.286 ; C15.2@385.613,97.35 cw(c384.642,96.367) 386.024,96.367 ; C15.2@385.613,97.35 cw(c384.642,96.367) 386.024,96.367 ; C15.2@385.613,97.35 cw(c384.642,96.367) 386.024,96.367 ; C15.2@385.613,97.35 cw(c384.642,96.367) 386.024,96.367 ; C15.2@385.614,97.723 ccw(c384.624,98.712) 386.024,98.712 ; C15.2@385.614,97.723 ccw(c384.624,98.712) 386.024,98.712 ; C15.2@385.614,97.723 ccw(c384.624,98.712) 386.024,98.712 ; C15.2@385.614,97.723 ccw(c384.624,98.712) 386.024,98.712 ; 386.715,116.82 cw(c388.537,116.82) D3.2@387.249,118.108 ; 386.715,116.82 cw(c388.537,116.82) D3.2@387.249,118.108 ; 386.715,116.82 cw(c388.537,116.82) D3.2@387.249,118.108 ; C13.2@386.401,123.13 cw(c385.645,122.374) 386.715,122.374 ccw(c385.645,122.374) C13.2@386.401,123.13 ; C13.2@386.401,123.504 ccw(c385.645,124.26) 386.715,124.26 cw(c385.645,124.26) C13.2@386.401,123.504
+VBAT: D2.1 P3.1 P3.2 P3.3 P3.4 | length 84.6
  Bottom Layer w0.381: P3.2@387.175,143.028 P3.4@389.715,143.028 P3.3@389.715,140.488 P3.1@387.175,140.488 387.175,142.827 P3.2@387.35,143.002 ; P3.1@386.78,140.884 ccw(c385.825,141.839) 387.175,141.839 ; P3.1@386.78,140.884 ccw(c385.825,141.839) 387.175,141.839 ; P3.1@386.78,140.884 ccw(c385.825,141.839) 387.175,141.839 ; P3.1@386.78,140.884 ccw(c385.825,141.839) 387.175,141.839 ; P3.2@386.78,142.632 cw(c385.825,141.677) 387.175,141.677 ; P3.2@386.78,142.632 cw(c385.825,141.677) 387.175,141.677 ; P3.2@386.78,142.632 cw(c385.825,141.677) 387.175,141.677 ; P3.2@386.78,142.632 cw(c385.825,141.677) 387.175,141.677 ; 387.175,141.677 cw(c388.526,141.677) P3.2@387.571,142.632 ; 387.175,141.677 cw(c388.526,141.677) P3.2@387.571,142.632 ; 387.175,141.677 cw(c388.526,141.677) P3.2@387.571,142.632 ; 387.175,141.677 cw(c388.526,141.677) P3.2@387.571,142.632 ; 387.175,141.839 ccw(c388.526,141.839) P3.1@387.571,140.884 ; 387.175,141.839 ccw(c388.526,141.839) P3.1@387.571,140.884 ; 387.175,141.839 ccw(c388.526,141.839) P3.1@387.571,140.884 ; 387.175,141.839 ccw(c388.526,141.839) P3.1@387.571,140.884 ; P3.1@387.571,140.092 cw(c388.526,139.137) 388.526,140.488 ; P3.1@387.571,140.092 cw(c388.526,139.137) 388.526,140.488 ; P3.1@387.571,140.092 cw(c388.526,139.137) 388.526,140.488 ; P3.1@387.571,140.092 cw(c388.526,139.137) 388.526,140.488 ; P3.1@387.571,140.884 ccw(c388.526,141.839) 388.526,140.488 ; P3.1@387.571,140.884 ccw(c388.526,141.839) 388.526,140.488 ; P3.1@387.571,140.884 ccw(c388.526,141.839) 388.526,140.488 ; P3.1@387.571,140.884 ccw(c388.526,141.839) 388.526,140.488 ; P3.2@387.571,142.632 cw(c388.526,141.677) 388.526,143.028 ; P3.2@387.571,142.632 cw(c388.526,141.677) 388.526,143.028 ; P3.2@387.571,142.632 cw(c388.526,141.677) 388.526,143.028 ; P3.2@387.571,142.632 cw(c388.526,141.677) 388.526,143.028 ; P3.2@387.571,143.424 ccw(c388.526,144.379) 388.526,143.028 ; P3.2@387.571,143.424 ccw(c388.526,144.379) 388.526,143.028 ; P3.2@387.571,143.424 ccw(c388.526,144.379) 388.526,143.028 ; P3.2@387.571,143.424 ccw(c388.526,144.379) 388.526,143.028 ; 388.365,140.488 cw(c388.365,139.137) P3.3@389.32,140.092 ; 388.365,140.488 ccw(c388.365,141.839) P3.3@389.32,140.884 ; 388.365,140.488 cw(c388.365,139.137) P3.3@389.32,140.092 ; 388.365,140.488 ccw(c388.365,141.839) P3.3@389.32,140.884 ; 388.365,140.488 cw(c388.365,139.137) P3.3@389.32,140.092 ; 388.365,140.488 ccw(c388.365,141.839) P3.3@389.32,140.884 ; 388.365,140.488 cw(c388.365,139.137) P3.3@389.32,140.092 ; 388.365,140.488 ccw(c388.365,141.839) P3.3@389.32,140.884 ; 388.365,143.028 cw(c388.365,141.677) P3.4@389.32,142.632 ; 388.365,143.028 ccw(c388.365,144.379) P3.4@389.32,143.424 ; 388.365,143.028 cw(c388.365,141.677) P3.4@389.32,142.632 ; 388.365,143.028 ccw(c388.365,144.379) P3.4@389.32,143.424 ; 388.365,143.028 cw(c388.365,141.677) P3.4@389.32,142.632 ; 388.365,143.028 ccw(c388.365,144.379) P3.4@389.32,143.424 ; 388.365,143.028 cw(c388.365,141.677) P3.4@389.32,142.632 ; 388.365,143.028 ccw(c388.365,144.379) P3.4@389.32,143.424 ; P3.3@389.32,140.884 ccw(c388.365,141.839) 389.715,141.839 ; P3.3@389.32,140.884 ccw(c388.365,141.839) 389.715,141.839 ; P3.3@389.32,140.884 ccw(c388.365,141.839) 389.715,141.839 ; P3.3@389.32,140.884 ccw(c388.365,141.839) 389.715,141.839 ; P3.4@389.32,142.632 cw(c388.365,141.677) 389.715,141.677 ; P3.4@389.32,142.632 cw(c388.365,141.677) 389.715,141.677 ; P3.4@389.32,142.632 cw(c388.365,141.677) 389.715,141.677 ; P3.4@389.32,142.632 cw(c388.365,141.677) 389.715,141.677 ; 389.715,141.677 cw(c391.066,141.677) P3.4@390.111,142.632 ; 389.715,141.677 cw(c391.066,141.677) P3.4@390.111,142.632 ; 389.715,141.677 cw(c391.066,141.677) P3.4@390.111,142.632 ; 389.715,141.677 cw(c391.066,141.677) P3.4@390.111,142.632 ; 389.715,141.839 ccw(c391.066,141.839) P3.3@390.111,140.884 ; 389.715,141.839 ccw(c391.066,141.839) P3.3@390.111,140.884 ; 389.715,141.839 ccw(c391.066,141.839) P3.3@390.111,140.884 ; 389.715,141.839 ccw(c391.066,141.839) P3.3@390.111,140.884
  Bottom Layer w1.016: D2.1@389.636,146.829 389.636,143.107 P3.4@389.715,143.028 ; 389.636,143.804 ccw(c390.491,143.804) P3.4@389.886,143.199 ; 389.636,143.804 ccw(c390.491,143.804) P3.4@389.886,143.199 ; 389.636,143.804 ccw(c390.491,143.804) P3.4@389.886,143.199 ; 389.636,143.804 ccw(c390.491,143.804) P3.4@389.886,143.199
BUZZER: U1.13
CANH: P2.3 R3.2 U3.7 | length 67
  Bottom Layer w0.381: U3.7@347.726,107.95 352.645,107.95 357.044,103.551 P2.3@357.044,94.234 ; R3.2@354.443,105.18 cw(c354.443,102.832) 356.103,104.492 ; R3.2@354.443,105.18 cw(c354.443,102.832) 356.103,104.492 ; R3.2@354.443,105.18 cw(c354.443,102.832) 356.103,104.492 ; R3.2@354.443,105.18 cw(c354.443,102.832) 356.103,104.492 ; R3.2@354.443,105.561 cw(c354.443,104.133) 355.452,105.142 ; R3.2@354.443,105.561 cw(c354.443,104.133) 355.452,105.142 ; R3.2@354.443,105.561 cw(c354.443,104.133) 355.452,105.142 ; R3.2@354.443,105.561 cw(c354.443,104.133) 355.452,105.142 ; P2.3@356.101,95.177 ccw(c353.825,97.453) 357.044,97.453 ; P2.3@356.101,95.177 ccw(c353.825,97.453) 357.044,97.453 ; P2.3@356.101,95.177 ccw(c353.825,97.453) 357.044,97.453 ; P2.3@356.101,95.177 ccw(c353.825,97.453) 357.044,97.453 ; P2.3@356.37,94.908 ccw(c354.744,96.534) 357.044,96.534 ; P2.3@356.37,94.908 ccw(c354.744,96.534) 357.044,96.534 ; P2.3@356.37,94.908 ccw(c354.744,96.534) 357.044,96.534 ; P2.3@356.37,94.908 ccw(c354.744,96.534) 357.044,96.534 ; 357.044,96.534 ccw(c359.344,96.534) P2.3@357.718,94.908 ; 357.044,96.534 ccw(c359.344,96.534) P2.3@357.718,94.908 ; 357.044,96.534 ccw(c359.344,96.534) P2.3@357.718,94.908 ; 357.044,96.534 ccw(c359.344,96.534) P2.3@357.718,94.908 ; 357.044,97.453 ccw(c360.263,97.453) P2.3@357.987,95.177 ; 357.044,97.453 ccw(c360.263,97.453) P2.3@357.987,95.177 ; 357.044,97.453 ccw(c360.263,97.453) P2.3@357.987,95.177 ; 357.044,97.453 ccw(c360.263,97.453) P2.3@357.987,95.177
CANL: P2.2 R3.1 U3.6 | length 79.2
  Bottom Layer w0.381: U3.6@347.726,106.68 351.677,106.68 352.044,106.313 P2.2@352.044,94.234 ; P2.2@351.101,95.177 ccw(c348.825,97.453) 352.044,97.453 ; P2.2@351.101,95.177 ccw(c348.825,97.453) 352.044,97.453 ; P2.2@351.101,95.177 ccw(c348.825,97.453) 352.044,97.453 ; P2.2@351.101,95.177 ccw(c348.825,97.453) 352.044,97.453 ; P2.2@351.37,94.908 ccw(c349.744,96.534) 352.044,96.534 ; P2.2@351.37,94.908 ccw(c349.744,96.534) 352.044,96.534 ; P2.2@351.37,94.908 ccw(c349.744,96.534) 352.044,96.534 ; P2.2@351.37,94.908 ccw(c349.744,96.534) 352.044,96.534 ; 351.866,106.491 ccw(c352.693,107.318) R3.1@352.693,106.148 ; 351.866,106.491 ccw(c352.693,107.318) R3.1@352.693,106.148 ; 351.866,106.491 ccw(c352.693,107.318) R3.1@352.693,106.148 ; 351.866,106.491 ccw(c352.693,107.318) R3.1@352.693,106.148 ; 352.044,96.534 ccw(c354.344,96.534) P2.2@352.718,94.908 ; 352.044,96.534 ccw(c354.344,96.534) P2.2@352.718,94.908 ; 352.044,96.534 ccw(c354.344,96.534) P2.2@352.718,94.908 ; 352.044,96.534 ccw(c354.344,96.534) P2.2@352.718,94.908 ; 352.044,97.453 ccw(c355.263,97.453) P2.2@352.987,95.177 ; 352.044,97.453 ccw(c355.263,97.453) P2.2@352.987,95.177 ; 352.044,97.453 ccw(c355.263,97.453) P2.2@352.987,95.177 ; 352.044,97.453 ccw(c355.263,97.453) P2.2@352.987,95.177 ; 352.044,103.069 cw(c355.188,103.069) R3.1@352.965,105.292 ; 352.044,103.069 cw(c355.188,103.069) R3.1@352.965,105.292 ; 352.044,103.069 cw(c355.188,103.069) R3.1@352.965,105.292 ; 352.044,103.069 cw(c355.188,103.069) R3.1@352.965,105.292 ; 352.044,103.989 cw(c354.268,103.989) R3.1@352.695,105.562 ; 352.044,103.989 cw(c354.268,103.989) R3.1@352.695,105.562 ; 352.044,103.989 cw(c354.268,103.989) R3.1@352.695,105.562 ; 352.044,103.989 cw(c354.268,103.989) R3.1@352.695,105.562 ; 352.044,104.909 cw(c353.348,104.909) R3.1@352.426,105.831 ; 352.044,104.909 cw(c353.348,104.909) R3.1@352.426,105.831 ; 352.044,104.909 cw(c353.348,104.909) R3.1@352.426,105.831 ; 352.044,104.909 cw(c353.348,104.909) R3.1@352.426,105.831 ; 352.044,105.828 cw(c352.429,105.828) R3.1@352.157,106.1 ; 352.044,105.828 cw(c352.429,105.828) R3.1@352.157,106.1 ; 352.044,105.828 cw(c352.429,105.828) R3.1@352.157,106.1 ; 352.044,105.828 cw(c352.429,105.828) R3.1@352.157,106.1 ; 352.107,106.25 cw(c351.622,105.764) R3.1@352.309,105.764 ; 352.107,106.25 cw(c351.622,105.764) R3.1@352.309,105.764 ; 352.107,106.25 cw(c351.622,105.764) R3.1@352.309,105.764 ; 352.107,106.25 cw(c351.622,105.764) R3.1@352.309,105.764
DMS: U1.11
DRAIN: D4.2 P5.1 P5.2 P5.3 P5.4 | length 150.1
  Bottom Layer w0.381: P5.2@346.027,145.875 P5.1@346.027,143.536 P5.3@348.567,143.536 ; P5.2@346.027,146.076 P5.4@348.567,146.076 P5.3@348.567,143.536 ; D4.2@365.269,151.384 364.49,151.384 356.642,143.536 P5.3@348.567,143.536 ; P5.1@345.632,143.932 ccw(c344.677,144.887) 346.027,144.887 ; P5.1@345.632,143.932 ccw(c344.677,144.887) 346.027,144.887 ; P5.1@345.632,143.932 ccw(c344.677,144.887) 346.027,144.887 ; P5.1@345.632,143.932 ccw(c344.677,144.887) 346.027,144.887 ; P5.2@345.632,145.68 cw(c344.677,144.725) 346.027,144.725 ; P5.2@345.632,145.68 cw(c344.677,144.725) 346.027,144.725 ; P5.2@345.632,145.68 cw(c344.677,144.725) 346.027,144.725 ; P5.2@345.632,145.68 cw(c344.677,144.725) 346.027,144.725 ; 346.027,144.725 cw(c347.378,144.725) P5.2@346.423,145.68 ; 346.027,144.725 cw(c347.378,144.725) P5.2@346.423,145.68 ; 346.027,144.725 cw(c347.378,144.725) P5.2@346.423,145.68 ; 346.027,144.725 cw(c347.378,144.725) P5.2@346.423,145.68 ; 346.027,144.887 ccw(c347.378,144.887) P5.1@346.423,143.932 ; 346.027,144.887 ccw(c347.378,144.887) P5.1@346.423,143.932 ; 346.027,144.887 ccw(c347.378,144.887) P5.1@346.423,143.932 ; 346.027,144.887 ccw(c347.378,144.887) P5.1@346.423,143.932 ; P5.1@346.423,143.14 cw(c347.378,142.185) 347.378,143.536 ; P5.1@346.423,143.14 cw(c347.378,142.185) 347.378,143.536 ; P5.1@346.423,143.14 cw(c347.378,142.185) 347.378,143.536 ; P5.1@346.423,143.14 cw(c347.378,142.185) 347.378,143.536 ; P5.1@346.423,143.932 ccw(c347.378,144.887) 347.378,143.536 ; P5.1@346.423,143.932 ccw(c347.378,144.887) 347.378,143.536 ; P5.1@346.423,143.932 ccw(c347.378,144.887) 347.378,143.536 ; P5.1@346.423,143.932 ccw(c347.378,144.887) 347.378,143.536 ; P5.2@346.423,145.68 cw(c347.378,144.725) 347.378,146.076 ; P5.2@346.423,145.68 cw(c347.378,144.725) 347.378,146.076 ; P5.2@346.423,145.68 cw(c347.378,144.725) 347.378,146.076 ; P5.2@346.423,145.68 cw(c347.378,144.725) 347.378,146.076 ; P5.2@346.423,146.472 ccw(c347.378,147.427) 347.378,146.076 ; P5.2@346.423,146.472 ccw(c347.378,147.427) 347.378,146.076 ; P5.2@346.423,146.472 ccw(c347.378,147.427) 347.378,146.076 ; P5.2@346.423,146.472 ccw(c347.378,147.427) 347.378,146.076 ; 347.217,143.536 cw(c347.217,142.185) P5.3@348.172,143.14 ; 347.217,143.536 ccw(c347.217,144.887) P5.3@348.172,143.932 ; 347.217,143.536 cw(c347.217,142.185) P5.3@348.172,143.14 ; 347.217,143.536 ccw(c347.217,144.887) P5.3@348.172,143.932 ; 347.217,143.536 cw(c347.217,142.185) P5.3@348.172,143.14 ; 347.217,143.536 ccw(c347.217,144.887) P5.3@348.172,143.932 ; 347.217,143.536 cw(c347.217,142.185) P5.3@348.172,143.14 ; 347.217,143.536 ccw(c347.217,144.887) P5.3@348.172,143.932 ; 347.217,146.076 cw(c347.217,144.725) P5.4@348.172,145.68 ; 347.217,146.076 ccw(c347.217,147.427) P5.4@348.172,146.472 ; 347.217,146.076 cw(c347.217,144.725) P5.4@348.172,145.68 ; 347.217,146.076 ccw(c347.217,147.427) P5.4@348.172,146.472 ; 347.217,146.076 cw(c347.217,144.725) P5.4@348.172,145.68 ; 347.217,146.076 ccw(c347.217,147.427) P5.4@348.172,146.472 ; 347.217,146.076 cw(c347.217,144.725) P5.4@348.172,145.68 ; 347.217,146.076 ccw(c347.217,147.427) P5.4@348.172,146.472 ; P5.3@348.172,143.932 ccw(c347.217,144.887) 348.567,144.887 ; P5.3@348.172,143.932 ccw(c347.217,144.887) 348.567,144.887 ; P5.3@348.172,143.932 ccw(c347.217,144.887) 348.567,144.887 ; P5.3@348.172,143.932 ccw(c347.217,144.887) 348.567,144.887 ; P5.4@348.172,145.68 cw(c347.217,144.725) 348.567,144.725 ; P5.4@348.172,145.68 cw(c347.217,144.725) 348.567,144.725 ; P5.4@348.172,145.68 cw(c347.217,144.725) 348.567,144.725 ; P5.4@348.172,145.68 cw(c347.217,144.725) 348.567,144.725 ; 348.567,144.725 cw(c349.918,144.725) P5.4@348.963,145.68 ; 348.567,144.725 cw(c349.918,144.725) P5.4@348.963,145.68 ; 348.567,144.725 cw(c349.918,144.725) P5.4@348.963,145.68 ; 348.567,144.725 cw(c349.918,144.725) P5.4@348.963,145.68 ; 348.567,144.887 ccw(c349.918,144.887) P5.3@348.963,143.932 ; 348.567,144.887 ccw(c349.918,144.887) P5.3@348.963,143.932 ; 348.567,144.887 ccw(c349.918,144.887) P5.3@348.963,143.932 ; 348.567,144.887 ccw(c349.918,144.887) P5.3@348.963,143.932 ; P5.3@348.963,143.14 cw(c349.918,142.185) 349.918,143.536 ; P5.3@348.963,143.14 cw(c349.918,142.185) 349.918,143.536 ; P5.3@348.963,143.14 cw(c349.918,142.185) 349.918,143.536 ; P5.3@348.963,143.14 cw(c349.918,142.185) 349.918,143.536 ; P5.3@348.963,143.932 ccw(c349.918,144.887) 349.918,143.536 ; P5.3@348.963,143.932 ccw(c349.918,144.887) 349.918,143.536 ; P5.3@348.963,143.932 ccw(c349.918,144.887) 349.918,143.536 ; P5.3@348.963,143.932 ccw(c349.918,144.887) 349.918,143.536 ; 361.997,148.891 cw(c365.269,145.62) D4.2@365.269,150.247 ; 361.997,148.891 cw(c365.269,145.62) D4.2@365.269,150.247 ; 361.997,148.891 cw(c365.269,145.62) D4.2@365.269,150.247 ; 361.997,148.891 cw(c365.269,145.62) D4.2@365.269,150.247 ; 362.648,149.542 cw(c365.269,146.92) D4.2@365.269,150.628 ; 362.648,149.542 cw(c365.269,146.92) D4.2@365.269,150.628 ; 362.648,149.542 cw(c365.269,146.92) D4.2@365.269,150.628 ; 362.648,149.542 cw(c365.269,146.92) D4.2@365.269,150.628 ; 363.298,150.192 cw(c365.269,148.221) D4.2@365.269,151.009 ; 363.298,150.192 cw(c365.269,148.221) D4.2@365.269,151.009 ; 363.298,150.192 cw(c365.269,148.221) D4.2@365.269,151.009 ; 363.298,150.192 cw(c365.269,148.221) D4.2@365.269,151.009 ; 363.949,150.843 cw(c365.269,149.522) D4.2@365.269,151.39 ; 363.949,150.843 cw(c365.269,149.522) D4.2@365.269,151.39 ; 363.949,150.843 cw(c365.269,149.522) D4.2@365.269,151.39 ; 363.949,150.843 cw(c365.269,149.522) D4.2@365.269,151.39 ; D4.2@364.599,151.493 cw(c365.269,150.823) 365.269,151.771 ; D4.2@364.599,151.493 cw(c365.269,150.823) 365.269,151.771 ; D4.2@364.599,151.493 cw(c365.269,150.823) 365.269,151.771 ; D4.2@364.599,151.493 cw(c365.269,150.823) 365.269,151.771